# EAGLE board display_v2 (EAGLE 5.06)
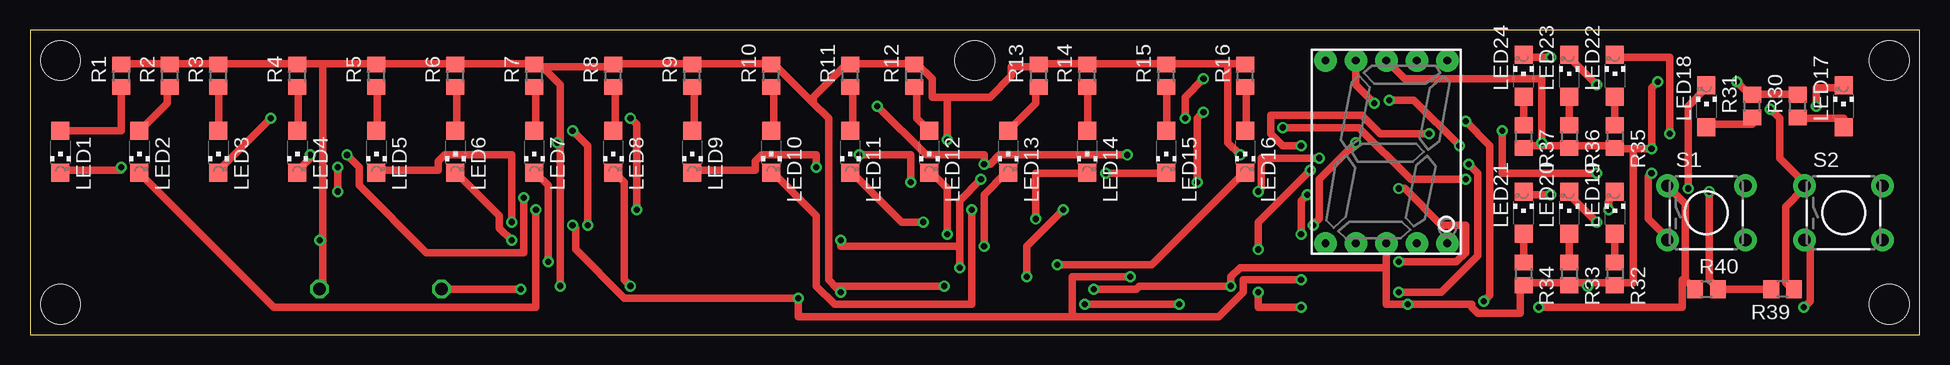
[diagram p0: board, top side]
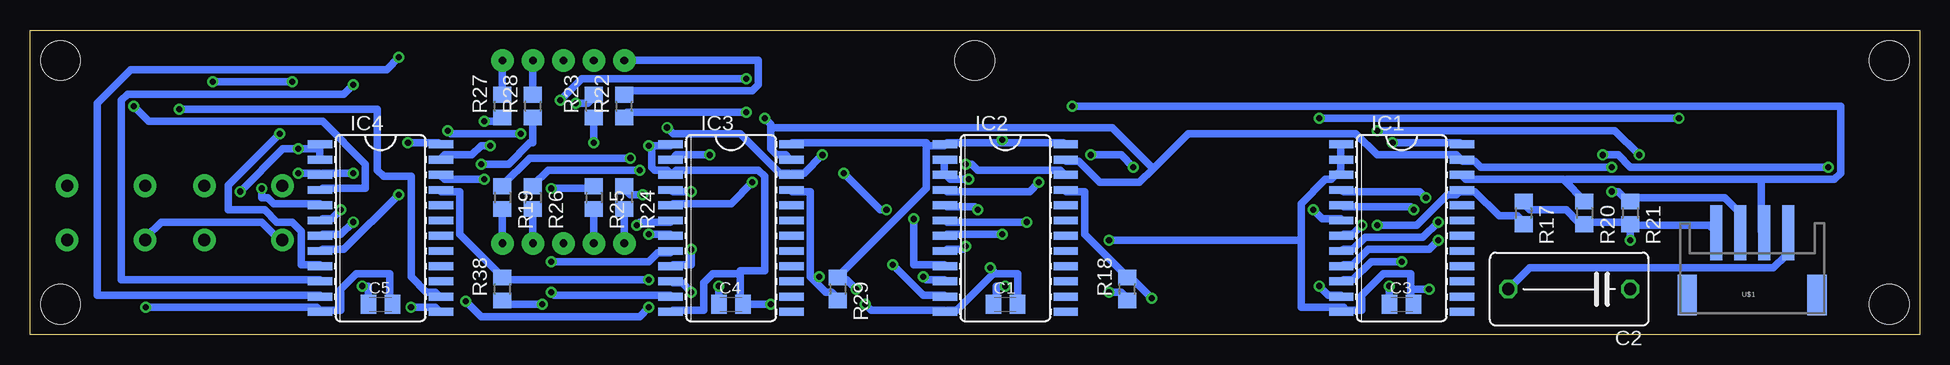
[diagram p1: board, bottom side, seen from below]

Size 157.48 x 25.4 mm. Coordinates in mm from the lower left corner, seen from the top.
Outline: 0,0 157.48,0 157.48,25.4 0,25.4 0,0
Copper layers (1*16): Top 0.035mm / dielectric 1.5mm / Bottom 0.035mm
Design rules "batchPCBrules *": minimum track width 25mil, minimum drill 20mil, track to track 8mil, track to pad 8mil, pad to pad 8mil, via to via 8mil, smd to smd 8mil, copper to edge 40mil, drill to drill 8mil, minimum pad ring 10mil, minimum via ring 8mil, stop-mask expansion 4mil, vias tented up to drill 0mil, thermal gap 10mil

## Footprints (pad centres in the part's own frame; a part is rotated, then mirrored left to right if it is on the bottom)
C0805K = smd 1.3 x 1.6: 1 -1,0; 2 1,0
C102-064X133 = drill 1.016 octagon: 1 -5.08,0; 2 5.08,0
24SOIT = smd 0.66 x 2.032: 1 -6.985,-5.029; 2 -5.715,-5.029; 3 -4.445,-5.029; 4 -3.175,-5.029; 5 -1.905,-5.029; 6 -0.635,-5.029; 7 0.635,-5.029; 8 1.905,-5.029; 9 3.175,-5.029; 10 4.445,-5.029; 11 5.715,-5.029; 12 6.985,-5.029; 13 6.985,5.029; 14 5.715,5.029; 15 4.445,5.029; 16 3.175,5.029; 17 1.905,5.029; 18 0.635,5.029; 19 -0.635,5.029; 20 -1.905,5.029; 21 -3.175,5.029; 22 -4.445,5.029; 23 -5.715,5.029; 24 -6.985,5.029
STAND-OFF = hole 3.302: 0,0
CHIPLED_1206 = smd 1.5 x 1.5: A 0,-1.75; C 0,1.75
R0805 = smd 1.3 x 1.5: 1 -0.95,0; 2 0.95,0
TACTILE-PTH = drill 1.016 pad 1.88 round: 1 -3.251,2.261; 2 3.251,2.261; 3 -3.251,-2.261; 4 3.251,-2.261
S4B-PH = smd 1 x 4.6: 1 -3,-2.16; 2 -1,-2.16; 3 1,-2.16; 4 3,-2.16 | smd 1.6 x 3.4: NC1 -5.4,3.04; NC2 5.4,3.04
7-SEGMENT-DISPLAY = drill 0.65 pad 1.88 round: 1 -5.08,-7.62; 2 -2.54,-7.62; 3 0,-7.62; 4 2.54,-7.62; 5 5.08,-7.62; 6 5.08,7.62; 7 2.54,7.62; 8 0,7.62; 9 -2.54,7.62; 10 -5.08,7.62

## Placement (x,y rotation side)
C1  100nF  [C0805K]  76.2,2.54 0 bottom
C2  100uF  [C102-064X133]  29.21,3.81 180 bottom
C3  100nF  [C0805K]  43.18,2.54 0 bottom
C4  100nF  [C0805K]  99.06,2.54 0 bottom
C5  100nF  [C0805K]  128.27,2.54 0 bottom
IC1  CAT9532WI  [24SOIT]  43.18,8.89 270 bottom
IC2  CAT9532WI  [24SOIT]  76.2,8.89 270 bottom
IC3  CAT9532WI  [24SOIT]  99.06,8.89 270 bottom
IC4  CAT9532WI  [24SOIT]  128.27,8.89 270 bottom
JP1  STAND-OFF  [STAND-OFF]  2.54,2.54 0 top
JP2  STAND-OFF  [STAND-OFF]  2.54,22.86 0 top
JP3  STAND-OFF  [STAND-OFF]  154.94,2.54 0 top
JP4  STAND-OFF  [STAND-OFF]  154.94,22.86 0 top
JP5  STAND-OFF  [STAND-OFF]  78.74,22.86 0 top
LED1  [CHIPLED_1206]  2.54,15.24 180 top
LED2  [CHIPLED_1206]  9.12,15.24 180 top
LED3  [CHIPLED_1206]  15.7,15.24 180 top
LED4  [CHIPLED_1206]  22.29,15.24 180 top
LED5  [CHIPLED_1206]  28.87,15.24 180 top
LED6  [CHIPLED_1206]  35.45,15.24 180 top
LED7  [CHIPLED_1206]  42.03,15.24 180 top
LED8  [CHIPLED_1206]  48.61,15.24 180 top
LED9  [CHIPLED_1206]  55.2,15.24 180 top
LED10  [CHIPLED_1206]  61.78,15.24 180 top
LED11  [CHIPLED_1206]  68.36,15.24 180 top
LED12  [CHIPLED_1206]  74.94,15.24 180 top
LED13  [CHIPLED_1206]  81.52,15.24 180 top
LED14  [CHIPLED_1206]  88.11,15.24 180 top
LED15  [CHIPLED_1206]  94.69,15.24 180 top
LED16  [CHIPLED_1206]  101.27,15.24 180 top
LED17  [CHIPLED_1206]  151.13,19.05 0 top
LED18  [CHIPLED_1206]  139.7,19.05 0 top
LED19  [CHIPLED_1206]  132.08,10.16 0 top
LED20  [CHIPLED_1206]  128.27,10.16 0 top
LED21  [CHIPLED_1206]  124.46,10.16 0 top
LED22  [CHIPLED_1206]  132.08,21.59 0 top
LED23  [CHIPLED_1206]  128.27,21.59 0 top
LED24  [CHIPLED_1206]  124.46,21.59 0 top
R1  [R0805]  7.62,21.59 90 top
R2  [R0805]  11.66,21.59 90 top
R3  [R0805]  15.7,21.59 90 top
R4  [R0805]  22.29,21.59 90 top
R5  [R0805]  28.87,21.59 90 top
R6  [R0805]  35.45,21.59 90 top
R7  [R0805]  42.03,21.59 90 top
R8  [R0805]  48.61,21.59 90 top
R9  [R0805]  55.2,21.59 90 top
R10  [R0805]  61.78,21.59 90 top
R11  [R0805]  68.36,21.59 90 top
R12  [R0805]  73.67,21.59 90 top
R13  [R0805]  84.06,21.59 90 top
R14  [R0805]  88.11,21.59 90 top
R15  [R0805]  94.69,21.59 90 top
R16  [R0805]  101.27,21.59 90 top
R17  10k  [R0805]  33.02,10.16 270 bottom
R18  10k  [R0805]  66.04,3.81 90 bottom
R19  [R0805]  118.11,11.43 270 bottom
R20  10k  [R0805]  27.94,10.16 270 bottom
R21  10k  [R0805]  24.13,10.16 270 bottom
R22  [R0805]  107.95,19.05 90 bottom
R23  [R0805]  110.49,19.05 90 bottom
R24  [R0805]  107.95,11.43 270 bottom
R25  [R0805]  110.49,11.43 270 bottom
R26  [R0805]  115.57,11.43 270 bottom
R27  [R0805]  118.11,19.05 90 bottom
R28  [R0805]  115.57,19.05 90 bottom
R29  10k  [R0805]  90.17,3.81 270 bottom
R30  [R0805]  147.32,19.05 90 top
R31  [R0805]  143.51,19.05 90 top
R32  [R0805]  132.08,5.08 270 top
R33  [R0805]  128.27,5.08 270 top
R34  [R0805]  124.46,5.08 270 top
R35  [R0805]  132.08,16.51 270 top
R36  [R0805]  128.27,16.51 270 top
R37  [R0805]  124.46,16.51 270 top
R38  10k  [R0805]  118.11,3.81 90 bottom
R39  [R0805]  146.05,3.81 180 top
R40  [R0805]  139.7,3.81 0 top
S1  SWITCH-MOMENTARY-2PTH  [TACTILE-PTH]  139.7,10.16 0 top
S2  SWITCH-MOMENTARY-2PTH  [TACTILE-PTH]  151.13,10.16 0 top
U$1  M04  [S4B-PH]  13.97,6.35 180 bottom
U$2  7-SEGMENT-DISPLAYPTH  [7-SEGMENT-DISPLAY]  113.03,15.24 0 top

## Library data of the parts
C1-C5 R1-R40 = rcl
IC1-IC4 U$1 = unicorn_v2
JP1-JP5 S1 S2 U$2 = SparkFun
LED1-LED24 = led

## Nets
N$1: IC1.4 LED1.C
N$2: IC3.4 R19.1
N$3: IC1.5 LED2.C
N$4: IC1.6 LED3.C
N$5: IC1.7 LED4.C
N$6: IC1.8 LED5.C
N$7: IC1.9 LED6.C
N$8: IC1.10 LED7.C
N$9: IC1.11 LED8.C
N$10: IC3.5 R22.1
N$11: LED1.A R1.1
N$12: LED2.A R2.1
N$13: LED3.A R3.1
N$14: LED4.A R4.1
N$15: LED5.A R5.1
N$16: LED6.A R6.1
N$17: LED7.A R7.1
N$18: LED8.A R8.1
N$19: IC2.4 LED9.C
N$20: IC2.5 LED10.C
N$21: IC2.6 LED11.C
N$22: IC2.7 LED12.C
N$23: IC2.8 LED13.C
N$24: IC2.9 LED14.C
N$25: IC2.10 LED15.C
N$26: IC2.11 LED16.C
N$27: LED9.A R9.1
N$28: LED10.A R10.1
N$29: LED11.A R11.1
N$30: LED12.A R12.1
N$31: LED13.A R13.1
N$32: LED14.A R14.1
N$33: LED15.A R15.1
N$34: LED16.A R16.1
N$35: IC3.6 R23.1
N$36: IC3.7 R24.1
N$37: IC3.8 R25.1
N$38: IC3.9 R26.1
N$39: IC3.10 R27.1
N$40: IC3.11 R28.1
N$41: IC4.14 R39.1 S2.1
N$42: IC4.4 LED17.C
N$43: IC4.5 LED18.C
N$44: IC4.6 LED19.C
N$45: IC4.7 LED20.C
N$46: IC4.8 LED21.C
N$47: IC4.9 LED22.C
N$48: IC4.10 LED23.C
N$49: R27.2 U$2.6
N$50: R19.2 U$2.5
N$51: R22.2 U$2.10
N$52: R23.2 U$2.9
N$53: R24.2 U$2.1
N$54: R25.2 U$2.2
N$55: R26.2 U$2.4
N$56: R28.2 U$2.7
N$57: IC4.11 LED24.C
N$58: LED17.A R30.1
N$59: LED18.A R31.1
N$60: LED19.A R32.1
N$61: LED20.A R33.1
N$62: LED21.A R34.1
N$63: LED22.A R35.1
N$64: IC4.13 R40.1 S1.1
N$65: LED23.A R36.1
N$66: LED24.A R37.1
PE: C1.2 C2.2 C3.2 C4.2 C5.2 IC1.1 IC1.2 IC1.3 IC1.12 IC2.2 IC2.3 IC2.12 IC3.1 IC3.3 IC3.12 IC4.3 IC4.12 S1.3 S2.3 U$1.1
RST: IC1.21 IC2.21 IC3.21 IC4.21 R17.2 R18.2 R29.2 R38.2
SCL: IC1.22 IC2.22 IC3.22 IC4.22 R20.1 U$1.2
SDA: IC1.23 IC2.23 IC3.23 IC4.23 R21.1 U$1.3
V+: C1.1 C2.1 C3.1 C4.1 C5.1 IC1.24 IC2.1 IC2.24 IC3.2 IC3.24 IC4.1 IC4.2 IC4.24 R1.2 R2.2 R3.2 R4.2 R5.2 R6.2 R7.2 R8.2 R9.2 R10.2 R11.2 R12.2 R13.2 R14.2 R15.2 R16.2 R17.1 R18.1 R20.2 R21.2 R29.1 R30.2 R31.2 R32.2 R33.2 R34.2 R35.2 R36.2 R37.2 R38.1 R39.2 R40.2 U$1.4 U$2.3 U$2.8

## Tracks (layer width: path | path; a pad name or v marks a point on that pad's centre or on a via)
N$1  (via drill 0.51)
  Top 0.635: v7.62,13.97 7.62,13.72 2.54,13.72 LED1.C | v26.42,14.99 27.43,13.97 27.43,12.45 33.02,6.86 41.15,6.86 v41.15,11.43
  Bottom 0.635: v7.62,13.97 24.13,13.97 25.15,14.99 v26.42,14.99 | v41.15,11.43 41.66,11.94 48.01,11.94 IC1.4
N$2  (via drill 0.51)
  Top 0.635: v107.44,14.73 102.62,14.73 102.62,12.19 v102.36,11.94
  Bottom 0.635: v107.44,14.73 115.82,14.73 118.11,12.45 R19.1 | v102.36,11.94 103.89,11.94 IC3.4
N$3  (via drill 0.51)
  Top 0.635: v42.16,10.41 42.16,2.29 20.32,2.29 9.14,13.46 LED2.C
  Bottom 0.635: v42.16,10.41 42.42,10.67 48.01,10.67 IC1.5
N$4  (via drill 0.51)
  Top 0.635: v20.07,18.03 15.75,13.72 LED3.C | v50.04,18.03 50.55,17.53 v50.55,10.41
  Bottom 0.635: v20.07,18.03 v50.04,18.03 | v50.55,10.41 49.78,9.65 48.26,9.65 IC1.6
N$5  (via drill 0.51)
  Top 0.635: v23.37,14.99 23.37,14.73 22.35,13.72 LED4.C | v45.21,17.02 46.48,15.75 v46.48,9.14
  Bottom 0.635: v23.37,14.99 25.4,17.02 v45.21,17.02 | v46.48,9.14 47.24,8.38 48.01,8.38 IC1.7
N$6  (via drill 0.51)
  Top 0.635: v40.13,9.4 40.13,14.99 34.54,14.99 34.04,14.48 34.04,13.72 28.96,13.72 LED5.C
  Bottom 0.635: v40.13,9.4 41.4,8.13 46.23,8.13 47.24,7.11 48.01,7.11 IC1.8
N$7  (via drill 0.51)
  Top 0.635: v40.13,7.87 39.12,8.89 39.12,9.91 35.56,13.46 LED6.C
  Bottom 0.635: v40.13,7.87 40.89,7.11 45.97,7.11 47.24,5.84 48.01,5.84 IC1.9
N$8  (via drill 0.51)
  Top 0.635: v43.18,6.1 43.18,12.45 42.16,13.46 LED7.C
  Bottom 0.635: v43.18,6.1 45.72,6.1 47.24,4.57 48.01,4.57 IC1.10
N$9  (via drill 0.51)
  Top 0.635: v50.04,4.06 49.53,4.57 49.53,12.7 48.77,13.46 LED8.C
  Bottom 0.635: v50.04,4.06 49.28,3.3 48.26,3.3 IC1.11
N$10  (via drill 0.51)
  Top 0.635: v97.79,18.54 97.28,18.03 v97.28,12.7
  Bottom 0.635: v97.79,18.54 107.7,18.54 107.95,18.29 R22.1 | v97.28,12.7 99.06,10.92 103.89,10.92 IC3.5
N$11
  Top 0.635: LED1.A 2.54,17.02 7.62,17.02 R1.1
N$12
  Top 0.635: LED2.A 9.14,17.02 11.43,19.3 11.43,20.57 R2.1
N$13
  Top 0.635: LED3.A 15.75,17.02 15.75,20.57 R3.1
N$14
  Top 0.635: LED4.A 22.35,17.02 22.35,20.57 R4.1
N$15
  Top 0.635: LED5.A 28.96,17.02 28.96,20.57 R5.1
N$16
  Top 0.635: LED6.A 35.56,17.02 35.56,20.57 R6.1
N$17
  Top 0.635: LED7.A 42.16,17.02 42.16,20.57 R7.1
N$18
  Top 0.635: LED8.A 48.77,17.02 48.77,20.57 R8.1
N$19  (via drill 0.51)
  Top 0.635: v65.53,13.97 65.53,14.99 60.96,14.99 60.45,14.48 60.45,13.72 55.37,13.72 LED9.C | v69.09,14.99 73.41,14.99 v73.41,12.7
  Bottom 0.635: v65.53,13.97 66.55,14.99 v69.09,14.99 | v73.41,12.7 74.17,11.94 81.03,11.94 IC2.4
N$20  (via drill 0.51)
  Top 0.635: v78.49,10.41 78.49,2.54 67.06,2.54 65.53,4.06 65.53,9.91 61.98,13.46 LED10.C
  Bottom 0.635: v78.49,10.41 78.74,10.67 81.03,10.67 IC2.5
N$21  (via drill 0.51)
  Top 0.635: v74.42,9.4 72.64,9.4 68.58,13.46 LED11.C
  Bottom 0.635: v74.42,9.4 81.03,9.4 IC2.6
N$22  (via drill 0.51)
  Top 0.635: v76.45,8.38 76.45,12.19 75.18,13.46 LED12.C
  Bottom 0.635: v76.45,8.38 81.03,8.38 IC2.7
N$23  (via drill 0.51)
  Top 0.635: v79.5,7.37 79.5,11.68 81.28,13.46 LED13.C
  Bottom 0.635: v79.5,7.37 79.76,7.11 81.03,7.11 IC2.8
N$24  (via drill 0.51)
  Top 0.635: v83.82,9.65 83.82,13.46 87.88,13.46 LED14.C
  Bottom 0.635: v83.82,9.65 83.82,5.84 81.28,5.84 IC2.9
N$25  (via drill 0.51)
  Top 0.635: v89.66,13.46 94.49,13.46 LED15.C | v86.11,10.41 83.06,7.37 v83.06,4.83
  Bottom 0.635: v89.66,13.46 86.61,10.41 v86.11,10.41 | v83.06,4.83 82.8,4.57 81.28,4.57 IC2.10
N$26  (via drill 0.51)
  Top 0.635: v85.6,5.84 93.47,5.84 101.09,13.46 LED16.C
  Bottom 0.635: v85.6,5.84 83.06,3.3 81.28,3.3 IC2.11
N$27
  Top 0.635: LED9.A 55.37,17.02 55.37,20.57 R9.1
N$28
  Top 0.635: LED10.A 61.98,17.02 61.98,20.57 R10.1
N$29
  Top 0.635: LED11.A 68.58,17.02 68.58,20.57 R11.1
N$30
  Top 0.635: LED12.A 74.93,17.02 73.91,18.03 73.91,20.57 R12.1
N$31
  Top 0.635: LED13.A 81.53,17.02 83.82,19.3 83.82,20.57 R13.1
N$32
  Top 0.635: LED14.A 88.14,17.02 88.14,20.57 R14.1
N$33
  Top 0.635: LED15.A 94.74,17.02 94.74,20.57 R15.1
N$34
  Top 0.635: LED16.A 101.35,17.02 101.35,20.57 R16.1
N$35  (via drill 0.51)
  Top 0.635: v110.49,16 107.44,12.95 107.44,9.65 v106.93,9.14
  Bottom 0.635: v106.93,9.14 106.68,9.4 104.14,9.4 IC3.6 | v110.49,16 R23.1
N$36  (via drill 0.51)
  Top 0.635: v106.43,11.68 105.92,11.18 v105.92,8.38
  Bottom 0.635: v106.43,11.68 107.44,11.68 107.95,12.19 R24.1 | v105.92,8.38 104.14,8.38 IC3.7
N$37  (via drill 0.51)
  Top 0.635: v114.05,12.19 114.55,12.19 117.6,9.14 119.63,9.14 119.63,6.86 118.87,6.1 v114.05,6.1
  Bottom 0.635: v114.05,12.19 110.49,12.19 R25.1 | v114.05,6.1 105.92,6.1 105.16,6.86 104.14,6.86 IC3.8
N$38  (via drill 0.51)
  Top 0.635: v106.68,13.72 102.36,9.4 v102.36,7.11
  Bottom 0.635: v106.68,13.72 114.3,13.72 115.57,12.45 R26.1 | v102.36,7.11 102.36,5.84 103.89,5.84 IC3.9
N$39  (via drill 0.51)
  Top 0.635: v119.63,17.78 121.67,15.75 121.67,3.3 v121.16,2.79 | v105.92,2.29 102.36,2.29 v102.36,3.56
  Bottom 0.635: v119.63,17.78 118.36,17.78 118.11,18.03 R27.1 | v121.16,2.79 119.89,1.52 106.68,1.52 v105.92,2.29 | v102.36,3.56 103.12,4.32 103.89,4.32 IC3.10
N$40  (via drill 0.51)
  Top 0.635: v119.89,14.22 120.65,13.46 120.65,6.6 117.6,3.56 v114.05,3.56
  Bottom 0.635: v119.89,14.22 117.6,14.22 115.82,16 115.57,16 R28.1 | v114.05,3.56 113.79,3.3 104.14,3.3 IC3.11
N$41  (via drill 0.51)
  Top 0.635: R39.1 146.81,3.81 146.3,4.32 146.3,10.67 147.83,12.19 S2.1 147.83,12.7 145.8,14.73 145.8,18.03 v145.03,18.8
  Bottom 0.635: v145.03,18.8 128.52,18.8 128.52,13.72 128.02,13.21 125.73,13.21 125.73,4.83 124.46,3.56 123.7,3.56 123.44,3.3 IC4.14
N$42  (via drill 0.51)
  Top 0.635: v148.84,19.05 148.84,20.57 151.13,20.57 LED17.C
  Bottom 0.635: v148.84,19.05 147.57,17.78 133.1,17.78 129.54,14.22 129.54,12.19 133.1,12.19 IC4.4
N$43  (via drill 0.51)
  Top 0.635: v138.18,12.19 138.18,19.05 139.7,20.57 LED18.C
  Bottom 0.635: v138.18,12.19 138.18,11.43 137.67,11.43 137.16,10.92 133.35,10.92 IC4.5
N$44  (via drill 0.51)
  Top 0.635: v131.57,10.41 131.57,11.18 132.08,11.68 LED19.C
  Bottom 0.635: v131.57,10.41 132.33,9.65 133.1,9.65 IC4.6
N$45  (via drill 0.51)
  Top 0.635: v130.56,9.4 128.27,11.68 LED20.C
  Bottom 0.635: v130.56,9.4 131.57,8.38 133.1,8.38 IC4.7
N$46  (via drill 0.51)
  Top 0.635: v126.75,11.68 124.46,11.68 LED21.C
  Bottom 0.635: v126.75,11.68 131.32,7.11 133.1,7.11 IC4.8
N$47  (via drill 0.51)
  Top 0.635: v136.65,16.76 136.65,23.11 132.08,23.11 LED22.C
  Bottom 0.635: v136.65,16.76 140.97,12.45 140.97,10.41 137.92,10.41 136.91,9.4 135.64,9.4 134.87,8.64 134.87,5.84 133.35,5.84 IC4.9
N$48  (via drill 0.51)
  Top 0.635: v130.56,20.83 128.27,23.11 LED23.C
  Bottom 0.635: v130.56,20.83 131.32,20.07 149.35,20.07 149.86,19.56 149.86,4.57 133.35,4.57 IC4.10
N$49
  Bottom 0.635: R27.2 U$2.6
N$50
  Bottom 0.635: U$2.5 R19.2
N$51
  Bottom 0.635: U$2.10 96.77,22.86 96.77,20.83 97.28,20.32 107.7,20.32 107.95,20.07 R22.2
N$52  (via drill 0.51)
  Top 0.635: v112.01,19.3 110.49,20.83 U$2.9
  Bottom 0.635: v112.01,19.3 111,19.3 110.49,19.81 R23.2
N$53
  Bottom 0.635: U$2.1 R24.2
N$54
  Bottom 0.635: U$2.2 R25.2
N$55
  Bottom 0.635: U$2.4 R26.2
N$56
  Bottom 0.635: R28.2 U$2.7
N$57  (via drill 0.51)
  Top 0.635: v126.75,23.11 124.46,23.11 LED24.C
  Bottom 0.635: v126.75,23.11 127.76,22.1 149.1,22.1 151.89,19.3 151.89,3.3 133.35,3.3 IC4.11
N$58
  Top 0.635: R30.1 147.32,18.03 151.13,18.03 LED17.A
N$59
  Top 0.635: LED18.A 139.7,17.53 143.51,17.53 R31.1
N$60
  Top 0.635: R32.1 LED19.A
N$61
  Top 0.635: R33.1 LED20.A
N$62
  Top 0.635: R34.1 LED21.A
N$63
  Top 0.635: R35.1 LED22.A
N$64  (via drill 0.51)
  Top 0.635: 137.92,4.57 138.68,3.81 R40.1 | 137.92,4.57 137.92,10.92 136.65,12.19 S1.1 | v125.73,2.29 137.67,2.29 137.67,4.57 137.92,4.57
  Bottom 0.635: v125.73,2.29 123.7,2.29 123.44,2.03 IC4.13
N$65
  Top 0.635: R36.1 LED23.A
N$66
  Top 0.635: R37.1 LED24.A
PE  (via drill 0.51)
  Top 0.635: v135.13,13.46 134.87,13.21 134.87,9.65 136.4,8.13 S1.3 | v147.83,2.29 148.34,2.79 148.34,7.62 148.08,7.87 S2.3 | v79.25,12.95 77.47,11.18 77.47,7.37 | 77.47,7.37 v77.47,5.59 | v67.56,7.87 67.56,7.37 77.47,7.37 | v87.88,2.54 v95.76,2.54 | v130.56,13.46 122.68,13.46 v122.68,17.02 | v116.59,16.76 112.52,16.76 111,18.29 103.38,18.29 103.38,16.76 104.39,15.75 v105.92,15.75 | C2.2 v40.89,3.81
  Bottom 0.635: C2.2 32.51,5.59 12.19,5.59 11.18,6.6 11.18,8.38 U$1.1 | C5.2 127.51,2.54 127.51,5.08 130.3,5.08 131.57,3.81 131.57,2.03 133.1,2.03 IC4.12 133.35,2.03 133.6,2.29 v147.83,2.29 | v135.13,13.46 133.35,13.46 IC4.3 133.1,13.46 v130.56,13.46 | S2.3 147.83,8.13 146.56,9.4 138.18,9.4 136.91,8.13 136.65,8.13 S1.3 | 105.66,15.75 105.66,13.97 105.41,13.72 104.39,13.72 104.14,13.46 IC3.3 103.89,13.46 103.63,13.72 96.77,13.72 96.27,13.21 96.27,5.33 98.3,5.33 98.3,5.08 | 105.66,15.75 104.14,15.75 IC3.1 | 98.3,5.08 98.3,2.54 C4.2 v95.76,2.54 | 98.3,5.08 100.58,5.08 101.35,4.32 101.35,2.03 103.89,2.03 IC3.12 | IC2.2 81.28,14.48 81.28,13.46 IC2.3 81.03,13.21 80.77,12.95 v79.25,12.95 | 77.22,5.08 75.18,5.08 75.18,2.54 C1.2 | 77.22,5.08 80.26,2.03 81.03,2.03 IC2.12 81.28,2.03 87.38,2.03 v87.88,2.54 | v77.47,5.59 77.22,5.33 77.22,5.08 | IC1.1 48.26,15.75 48.26,14.73 IC1.2 48.26,14.48 48.26,13.46 IC1.3 48.51,13.46 49.02,12.95 49.53,12.95 51.56,10.92 51.56,7.87 | 42.42,3.81 42.42,5.08 44.7,5.08 46.48,3.3 46.48,2.03 48.01,2.03 | 42.42,3.81 42.42,2.54 C3.2 | 48.01,2.03 IC1.12 | 51.56,7.87 51.56,2.29 48.01,2.29 48.01,2.03 | 51.56,7.87 v67.56,7.87 | v122.68,17.02 122.43,16.76 v116.59,16.76 | 105.66,15.75 v105.92,15.75 | v40.89,3.81 42.42,3.81
RST  (via drill 0.51)
  Top 0.635: v45.21,9.14 45.47,8.89 45.47,7.11 49.53,3.05 v64.01,3.05 64.01,1.52 86.87,1.52 | v105.92,4.57 101.09,4.57 101.09,3.56 99.06,1.52 86.87,1.52 | v91.69,4.83 86.87,4.83 86.87,1.52
  Bottom 0.635: 92.08,4.45 92.46,4.83 92.46,11.94 93.98,11.94 IC3.21 | 92.08,4.45 91.19,3.56 90.68,3.56 90.17,3.05 R29.2 | IC4.21 123.19,11.94 121.67,11.94 121.67,8.38 118.11,4.83 R38.2 117.86,4.57 v105.92,4.57 | R17.2 33.02,9.4 33.53,9.91 35.05,9.91 37.08,11.94 38.1,11.94 IC1.21 38.35,11.94 38.61,11.68 39.37,11.68 41.91,9.14 v45.21,9.14 | IC2.21 71.12,11.94 69.6,11.94 69.6,8.38 66.04,4.83 R18.2 65.79,4.57 65.53,4.57 v64.01,3.05 | v91.69,4.83 92.08,4.45
SCL  (via drill 0.51)
  Top 0.635: v91.44,14.99 80.77,14.99 80.01,14.22 v79.5,14.22 79.5,14.99 74.68,14.99 v70.61,19.05 | v119.63,12.95 115.06,12.95 110.74,17.27 v104.39,17.27
  Bottom 0.635: 29.59,12.83 29.72,12.95 37.85,12.95 38.1,13.21 IC1.22 | 29.59,12.83 27.94,11.18 R20.1 | 13.21,12.95 13.21,8.64 U$1.2 | 13.21,12.95 29.46,12.95 29.59,12.83 | v79.5,14.22 78.99,14.22 78.49,13.72 71.63,13.72 71.37,13.46 IC2.22 | v91.44,14.99 92.96,13.46 93.98,13.46 IC3.22 94.23,13.46 95,13.46 98.3,16.76 103.89,16.76 v104.39,17.27 | v119.63,12.95 122.94,12.95 123.19,13.21 IC4.22 | v70.61,19.05 6.6,19.05 6.6,13.46 7.11,12.95 13.21,12.95
SDA  (via drill 0.51)
  Top 0.635: v119.13,15.75 115.32,19.56 v113.28,19.56 | v97.79,21.34 96.27,19.81 v96.27,18.03 | v25.65,11.94 v25.65,13.97
  Bottom 0.635: U$1.3 14.99,8.64 14.99,10.16 16.26,11.43 23.88,11.43 24.13,11.18 R21.1 24.38,11.18 25.15,11.94 v25.65,11.94 | 63.88,13.84 65.02,12.7 68.33,12.7 70.1,14.48 71.12,14.48 IC2.23 | 63.88,13.84 60.96,16.76 46.99,16.76 45.21,14.99 38.61,14.99 38.35,14.73 IC1.23 38.1,14.48 37.08,14.48 36.58,13.97 v25.65,13.97 | 95.76,17.27 95.76,15.49 95.25,14.99 94.49,14.99 94.23,14.73 IC3.23 | 95.76,17.27 67.31,17.27 63.88,13.84 | v119.13,15.75 119.89,15.75 120.65,14.99 122.94,14.99 123.19,14.73 IC4.23 | v113.28,19.56 111.51,21.34 v97.79,21.34 | v96.27,18.03 95.76,17.53 95.76,17.27
V+  (via drill 0.51)
  Top 0.635: 113.03,5.59 U$2.3 | 113.03,5.59 113.03,2.54 v114.81,2.54 120.14,2.54 120.14,2.29 120.65,1.78 124.21,1.78 124.21,4.06 R34.2 124.46,4.32 128.27,4.32 R33.2 128.52,4.32 129.79,4.32 | 113.03,5.59 100.84,5.59 100.08,4.83 v100.08,4.06 92.46,4.06 92.2,3.81 v88.65,3.81 | 129.79,4.32 132.08,4.32 R32.2 132.33,4.32 133.6,4.32 133.6,15.49 | 129.79,4.32 v129.79,4.06 | R39.2 R40.2 140.46,4.06 139.95,4.57 v139.95,11.94 | R30.2 147.32,20.07 143.51,20.07 R31.2 143.26,20.07 v142.24,21.08 | 125.98,15.75 128.27,15.75 R36.2 128.52,15.75 132.08,15.75 R35.2 132.33,15.49 133.6,15.49 | 125.98,15.75 124.46,15.75 R37.2 | 125.98,15.75 v125.98,16 125.98,21.34 114.55,21.34 U$2.8 | 133.6,15.49 v135.13,15.49 135.13,20.57 v135.64,21.08 | R1.2 7.62,22.61 11.43,22.61 R2.2 11.94,22.61 15.49,22.61 R3.2 16,22.61 22.1,22.61 R4.2 22.61,22.61 24.38,22.61 | 24.38,22.61 28.7,22.61 R5.2 28.96,22.61 35.31,22.61 R6.2 35.56,22.61 41.91,22.61 R7.2 42.16,22.35 42.67,22.35 42.8,22.23 | C2.1 24.38,4.06 24.38,7.87 | 24.38,7.87 24.38,22.61 | v24.13,7.87 24.38,7.87 | 44.2,16 44.2,20.83 42.8,22.23 | 44.2,16 v44.2,4.06 | 44.2,16 v43.94,16 | 42.8,22.23 42.93,22.35 48.51,22.35 R8.2 48.77,22.61 55.12,22.61 R9.2 55.37,22.61 61.47,22.61 R10.2 61.98,22.61 65.15,19.43 | 99.82,22.61 95,22.61 R15.2 94.49,22.61 88.39,22.61 R14.2 87.88,22.61 84.07,22.61 R13.2 83.82,22.35 81.79,22.35 81.79,21.59 80.01,19.81 76.45,19.81 | 99.82,22.61 101.09,22.61 R16.2 | v100.84,14.99 99.82,16 99.82,22.61 | 67.18,3.94 66.55,4.57 66.55,18.03 65.15,19.43 | 67.18,3.94 v67.56,3.56 | v76.2,4.06 67.31,4.06 67.18,3.94 | 65.15,19.43 65.28,19.56 65.28,19.81 68.07,22.61 R11.2 68.58,22.61 73.66,22.61 R12.2 73.91,22.61 75.18,21.34 75.18,19.81 76.45,19.81
  Top 0.635: 76.45,19.81 v76.45,16.26
  Bottom 0.635: v114.81,2.54 117.86,2.54 118.11,2.79 R38.1 | v100.08,4.06 100.08,2.54 C4.1 | v129.79,4.06 129.29,4.06 129.29,2.54 C5.1 | 133.35,15.49 133.35,15.75 IC4.1 | 133.35,15.49 133.35,14.73 IC4.2 | v125.98,16 123.44,16 IC4.24 | 133.35,15.49 v135.13,15.49 136.4,15.49 v139.95,11.94 | v135.64,21.08 v142.24,21.08 | R21.2 24.13,9.4 27.94,9.4 R20.2 28.19,9.4 28.45,9.4 29.46,10.41 32.51,10.41 33.02,10.92 R17.1 | U$1.4 17.02,8.64 17.53,9.14 23.88,9.14 R21.2 | R21.2 v24.13,7.87 | v44.2,4.06 44.2,2.54 C3.1 | v43.94,16 38.35,16 IC1.24 | 82.8,15.75 82.8,12.19 90.17,4.83 R29.1 89.92,4.57 89.41,4.57 v88.65,3.81 | 82.8,15.75 81.28,15.75 IC2.1 81.03,16 76.45,16 | 76.45,16 71.37,16 IC2.24 | IC3.24 93.98,16 82.8,16 82.8,15.75 | v100.84,14.99 103.63,14.99 103.89,14.73 IC3.2 | v67.56,3.56 66.55,3.56 66.04,3.05 R18.1 | v76.2,4.06 76.96,4.06 76.96,2.54 C1.1 | v76.45,16.26 76.45,16